# Altium PCB modulo_LCD_ShiftRegister_PCB.PcbDoc
Units mm, origin at the board's own origin, x right, y up, seen from the top; angles counter-clockwise.
Board outline 22.35 x 50.3 mm, 2 copper layers (Top Layer, Bottom Layer); 5 components, 16 nets, 43 pads, 6 vias.
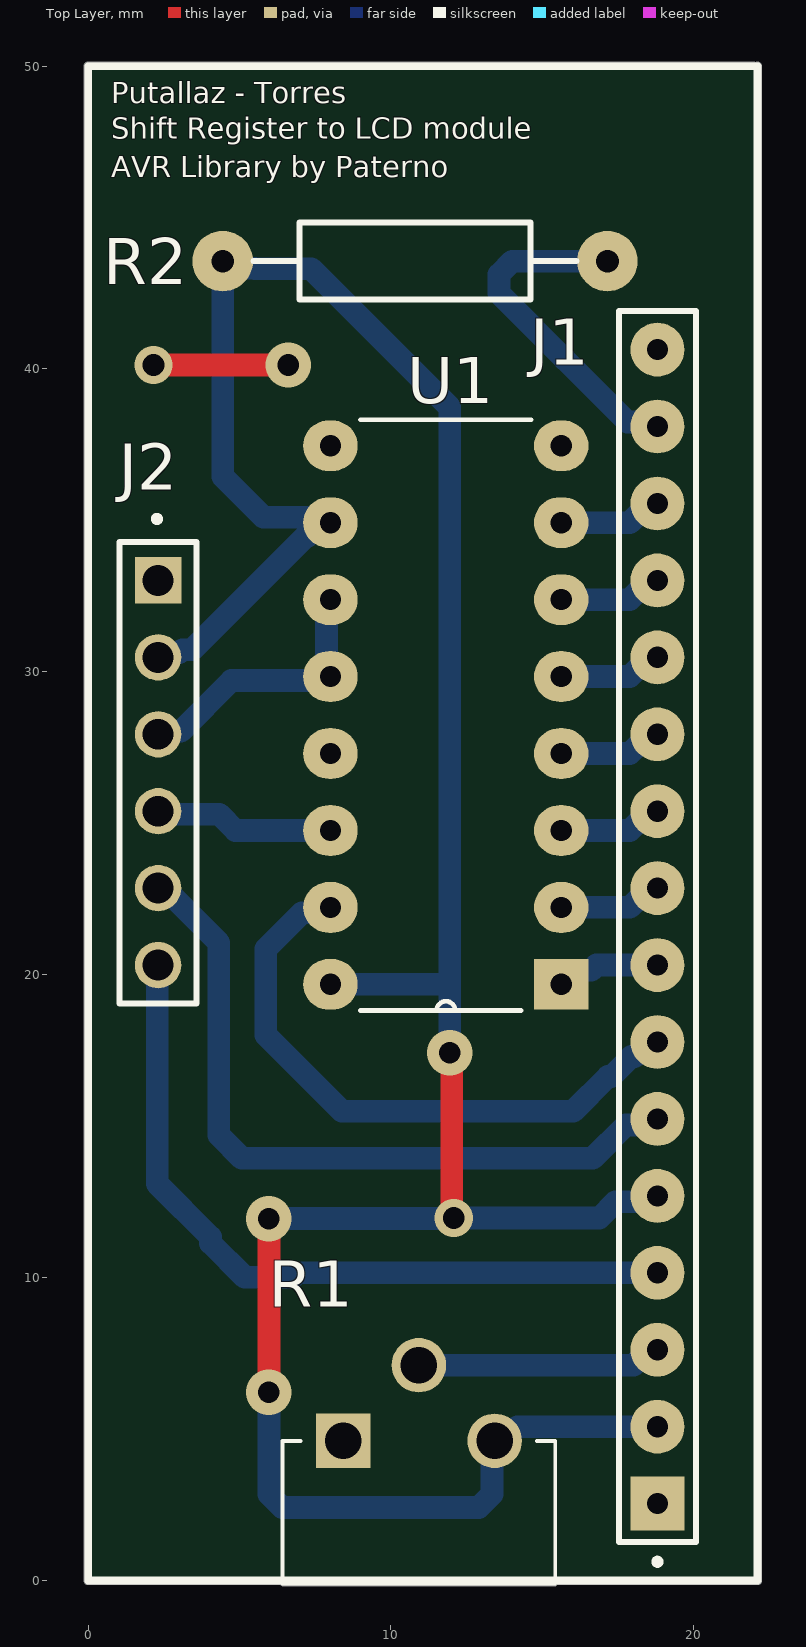
[diagram p0: Top Layer view]
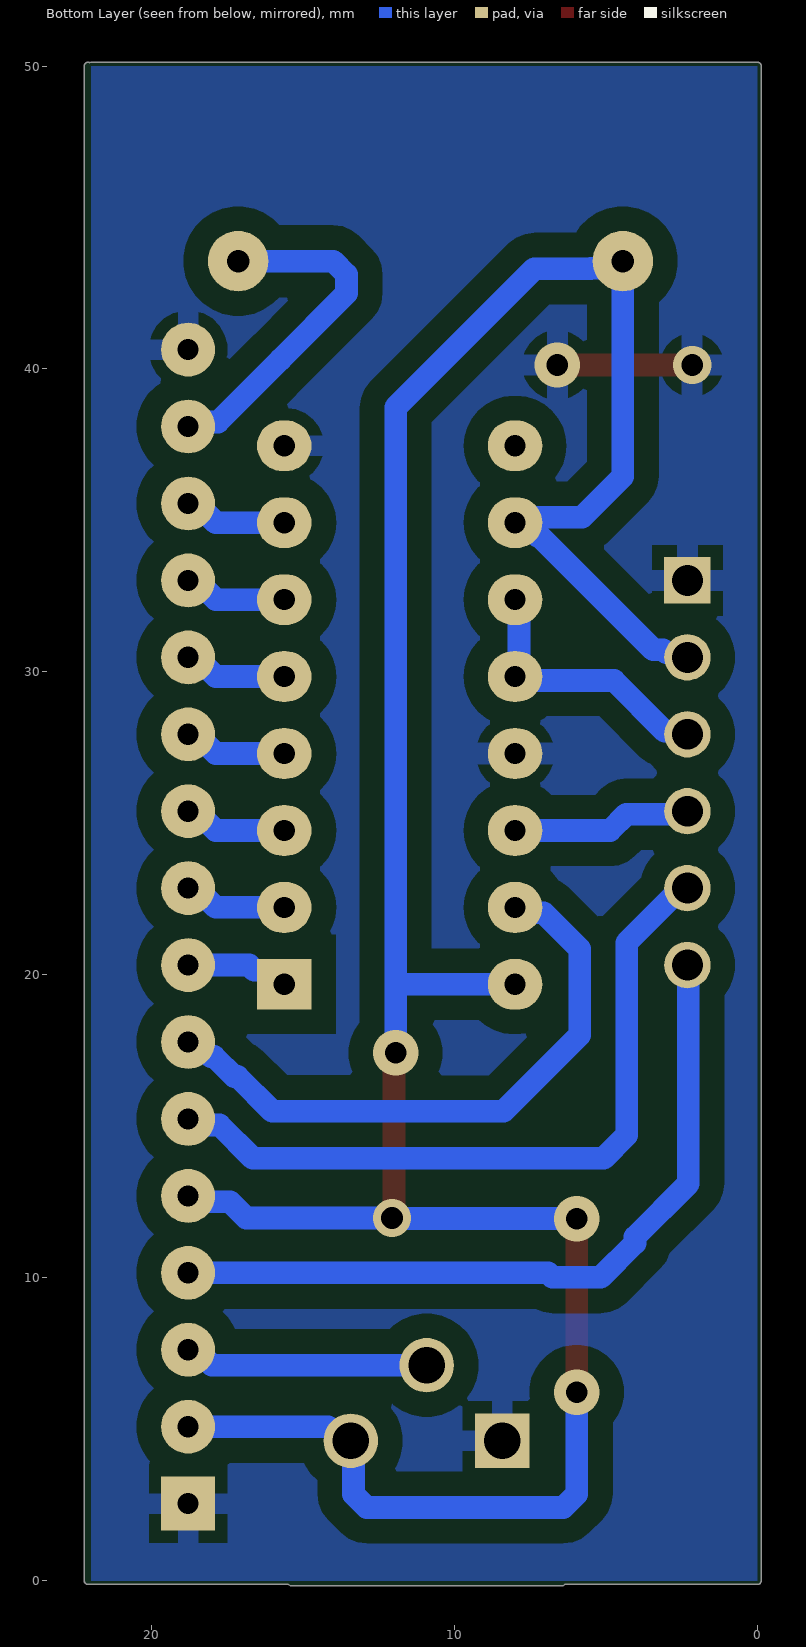
[diagram p1: Bottom Layer view, seen from below]
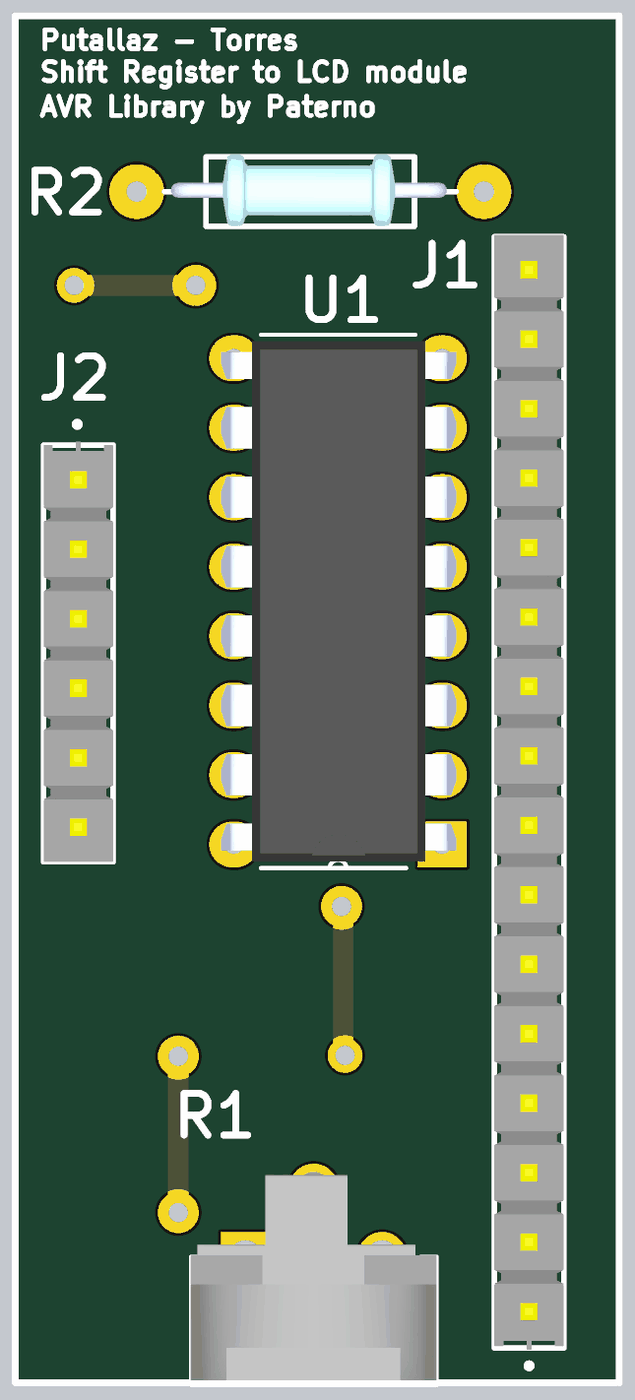
[diagram p2: 3D render of the assembled board from above, using the file's embedded part models]

## Layer stack, top to bottom
Top Solder: solder mask 0.0102, Solder Resist, Dk 3.5
Top Layer: signal copper 0.0356
Dielectric 1: dielectric 0.32, FR-4, Dk 4.8
Bottom Layer: signal copper 0.0356
Bottom Solder: solder mask 0.0102, Solder Resist, Dk 3.5

## Board outline
0,-0.127 cw(c0,0) -0.127,0 -0.127,50 cw(c0,50) 0,50.127 22,50.127 22.049,50.118 cw(c22.098,50) 22.225,50 22.225,0 cw(c22.098,0) 22.049,-0.118 22,-0.127 15.483,-0.127 15.422,-0.172 6.422,-0.172 6.361,-0.127

## Design rules (kind name [scope] priority, off if disabled: settings)
Clearance [All] p1: gap=0.8 ignorepadtopadclearanceinfootprint=TRUE
PolygonConnect [All] p1: connectstyle=Relief reliefconductorwidth=0.7 reliefentries=4 polygonreliefangle="90 Angle" airgapwidth=0.4
RoutingTopology [All] p1: topology=Daisy_Balanced
RoutingVias [All] p1: holewidth=0.711 width=1.5 viastyle="Through Hole" minholewidth=0.711 minwidth=1.27 maxholewidth=0.711 maxwidth=1.5
SolderMaskExpansion [All] p1: expansion=0.102 istentingtop=FALSE
Width [All] p1: maxlimit=0.75 minlimit=0.254 preferedwidth=0.75
29 further rules are at their usual default settings.

## Components (designator, comment, footprint, x,y, rotation, side; value= is the part's Value field where it differs from the comment)
J1 "LCD16X2" "HEADER 16 PIN" 18.796,2.54 r90 top
J2 "LOGIC INPUT" "HEADER 6 PIN" 2.311,26.67 r270 top
R1 "50K" "TRIMMING POTENTIOMETER" 8.422,4.612 r0 top value=1k
R2 "220ohm" "Res Axial 0.5" 10.795,43.561 r0 top
U1 "74HC595N" DIP254P762X420-16 8.001,37.465 r180 top

## Footprints (in the part's own frame and the unit in brackets; to place one, negate y for a bottom-side part, rotate by r counter-clockwise, add the part's x,y. Pads: shape width x height; smd on the part's side, far side on the other; paste and mask are expansions set on the pad)
DIP254P762X420-16 [mm]
  rect 1.8x1.676 hole 0.7: 1(-7.62,17.78)
  oval 1.8x1.676 hole 0.7: 2(-7.62,15.24) 3(-7.62,12.7) 4(-7.62,10.16) 5(-7.62,7.62) 6(-7.62,5.08) 7(-7.62,2.54) 8(-7.62,0) 9(0,0) 10(0,2.54) 11(0,5.08) 12(0,7.62) 13(0,10.16) 14(0,12.7) 15(0,15.24) 16(0,17.78)
  silkscreen extent -6.63,-0.86 -0.99,18.64, body extent -8.55,-0.62 0.89,18.4, height 4.2
"HEADER 6 PIN" [mm]
  rect 1.53x1.53 / inner round 1.53 / far side rect 1.53x1.53 hole 1.02: 01(-6.35,0)
  round 1.53 hole 1.02: 02(-3.81,0) 03(-1.27,0) 04(1.27,0) 05(3.81,0) 06(6.35,0)
  silkscreen extent -8.48,-1.27 7.62,1.27, body extent -7.75,-1.27 7.62,1.27, height 8.38
"HEADER 16 PIN" [mil]
  rect 70x70 hole 27.56: 01(0,0)
  round 70 hole 27.56: 02(100,0) 03(200,0) 04(300,0) 05(400,0) 06(500,0) 07(600,0) 08(700,0) 09(800,0) 10(900,0) 11(1000,0) 12(1100,0) 13(1200,0) 14(1300,0) 15(1400,0) 16(1500,0)
  silkscreen extent -80,-50 1550,50, body extent -52,-50 1553,50, height 330
"Res Axial 0.5" [mm] "Axial Device, Thru-Hole; 2 Leads; 0.5 in Pin Spacing"
  round 2 hole 0.75: 1(-6.35,0) 2(6.35,0)
  silkscreen extent -5.33,-1.27 5.33,1.27, body extent -5.1,-1.25 5,1.35, height 2.59
"TRIMMING POTENTIOMETER" [mm]
  rect 1.8x1.8 hole 1.2: 1(0,0)
  round 1.8 hole 1.2: 2(2.5,2.5) 3(5,0)
  silkscreen extent -2,-4.72 7,0, body extent -2.01,-4.53 6.98,3.56, height 10.49

## Part data
J1: Package=None, Availability=Unavailable, MP=TSW-116-07-T-S-LL, Price=None
J2: "Connector Header Through Hole 6 position 0.100 (2.54mm)", Package=None, Check_prices=https://www.snapeda.com/parts/TSW-106-26-T-S/Samtec/view-part/?ref=eda, MF=Samtec, MP=TSW-106-26-T-S, SnapEDA_Link=https://www.snapeda.com/parts/TSW-106-26-T-S/Samtec/view-part/?ref=snap
R1: library part Potentiometer, "4K7", position=0.5, SimulationGenericComponent=True
R2: library part Res1, "Resistor", LatestRevisionDate=17-Jul-2002, LatestRevisionNote="Re-released for DXP Platform.", PackageDescription="Axial Device, Thru-Hole; 2 Leads; 0.3 in Pin Spacing", PackageReference=AXIAL-0.3, Published=8-Jun-2000, Publisher="Altium Limited"
U1: library part 74HC595N,112, "Shift Shift Register 1 Element 8 Bit 16-DIP", Package="SOT38-4-16 Nexperia", Availability="In Stock", Check_prices=https://www.snapeda.com/parts/74HC595N,112/NXP+USA+Inc./view-part/?ref=eda, MF="NXP USA", MP=74HC595N,112, Price=None, Purchase-URL=https://pricing.snapeda.com/search/part/74HC595N,112/?ref=eda, SnapEDA_Link=https://www.snapeda.com/parts/74HC595N,112/NXP+USA+Inc./view-part/?ref=snap

## Via types
v1: diameter 1.5, hole 0.711, Top Layer to Bottom Layer, 4 vias
v2: diameter 1.27, hole 0.711, Top Layer to Bottom Layer, 2 vias

## Nets (pads, with @x,y where several pads share a name; then routed paths per layer and width w, separated by ;. In a path a pad name is that pad's centre, name@x,y a point inside that pad or via, vN(x,y) a via of type N, cw(c..) or ccw(c..) an arc to the next point about the centre after c; other vN are vias at no path point)
ENABLE: J1.06 J2.05 | length 24.4
  Bottom Layer w0.75: J2.05 2.515,22.86 4.318,21.057 4.318,14.698 5.072,13.944 16.661,13.944 17.761,15.043 18.599,15.043 J1.06
GND: J1.01 J1.16 J2.01 R1.1 U1.8 U1.13 | length 4.4
  Top Layer w0.75: v2(2.159,40.132) v1(6.604,40.132)
NetJ1_03: J1.03 R1.2 | length 8.1
  Bottom Layer w0.75: R1.2 18.01,7.112 18.518,7.62 J1.03
NetJ1_07: J1.07 U1.15 | length 20.2
  Bottom Layer w0.75: U1.15@7.747,22.225 7.57,22.048 7.062,22.048 5.868,20.854 5.868,18.008 8.382,15.494 16.019,15.494 17.164,16.639 17.276,16.639 17.941,17.304 18.042,17.304 18.518,17.78 J1.07
NetJ1_08: J1.08 U1.1 | length 3.4
  Bottom Layer w0.75: U1.1 16.084,20.148 16.61,20.148 16.782,20.32 J1.08
NetJ1_09: J1.09 U1.2 | length 3.4
  Bottom Layer w0.75: U1.2 17.883,22.225 18.518,22.86 J1.09
NetJ1_10: J1.10 U1.3 | length 3.4
  Bottom Layer w0.75: U1.3 17.883,24.765 18.518,25.4 J1.10
NetJ1_11: J1.11 U1.4 | length 3.4
  Bottom Layer w0.75: U1.4 17.883,27.305 18.518,27.94 J1.11
NetJ1_12: J1.12 U1.5 | length 3.4
  Bottom Layer w0.75: U1.5 17.883,29.845 18.518,30.48 J1.12
NetJ1_13: J1.13 U1.6 | length 3.4
  Bottom Layer w0.75: U1.6 17.883,32.385 18.518,33.02 J1.13
NetJ1_14: J1.14 U1.7 | length 3.4
  Bottom Layer w0.75: U1.7 17.883,34.925 18.518,35.56 J1.14
NetJ1_15: J1.15 R2.2 | length 11.4
  Bottom Layer w0.75: R2.2 14.003,43.561 13.564,43.122 13.564,42.5 15.748,40.316 15.748,40.309 17.809,38.249 18.647,38.249 J1.15
NetJ2_03: J2.03 U1.11 U1.12 | length 9
  Bottom Layer w0.75: J2.03@2.286,27.94 2.387,28.041 3.064,28.041 4.738,29.716 7.874,29.716 U1.11@7.874,32.391
NetJ2_04: J2.04 U1.14 | length 5.1
  Bottom Layer w0.75: J2.04@2.286,25.4 2.387,25.299 4.334,25.299 4.867,24.765 U1.14@7.112,24.765
RESET: J1.04 J2.06 | length 25.2
  Bottom Layer w0.75: J2.06@2.286,20.32 2.286,13.103 4.044,11.345 4.044,11.141 5.172,10.013 6.766,10.013 6.913,10.16 J1.04
VCC: J1.02 J1.05 J2.02 R1.3 R2.1 U1.10 U1.16 | length 96.1
  Top Layer w0.75: v1(5.969,6.223) v1(5.969,11.938) ; v1(11.938,17.419) 12.002,17.356 12.002,12.034 v2(12.065,11.97)
  Bottom Layer w0.75: J2.02 2.461,30.629 3.012,30.629 3.117,30.734 3.441,30.734 7.169,34.462 7.225,34.462 7.689,34.925 U1.10 ; R2.1 R2.1@4.445,43.307 ; v1(5.969,6.223) 5.969,2.852 6.408,2.413 12.896,2.413 13.335,2.852 13.335,4.525 R1.3 13.706,4.612 14.174,5.08 J1.02 ; v1(5.969,11.938) 5.985,11.954 v2@12.049,11.954 ; U1.10@7.824,35.102 5.792,35.102 4.445,36.449 R2.1@4.445,43.307 ; U1.16 11.811,19.685 11.938,19.812 ; v1(11.938,17.419) 11.938,19.812 ; J1.05 18.599,12.503 17.413,12.503 16.879,11.97 v2(12.065,11.97) ; R2.1@4.445,43.307 4.46,43.322 5.495,43.322 5.509,43.307 7.366,43.307 11.938,38.735 11.938,19.812 ; v2@12.049,11.954 v2(12.065,11.97) ; v2@12.049,11.954 v2(12.065,11.97)
pads on no net: U1.9

## Polygon pours and split planes (outlines as drawn)
GND on Bottom Layer "NONET_L-01_P-001" (solid, pour order 0): 0,50 22,50 22,0 0,0

## Silkscreen, mask and mechanical layers (free items; w line width, h text height)
Top Overlay:
  lines w0.254: 22,0 0,0 0,50 22,50 ; 22.098,0 22.098,50
  text "Putallaz - Torres" at 0.762,48.768 h0.7
  text "Shift Register to LCD module" at 0.762,47.604 h0.7
  text "AVR Library by Paterno" at 0.762,46.334 h0.7